# Altium PCB stepstick_rotated.PcbDoc
Units mm, origin at the board's own origin, x right, y up, seen from the top; angles counter-clockwise.
Board outline 20.32 x 15.24 mm, 2 copper layers (Top Layer, Bottom Layer), stack 2.37 mm thick; 3 components, 5 nets, 26 pads, 0 vias.
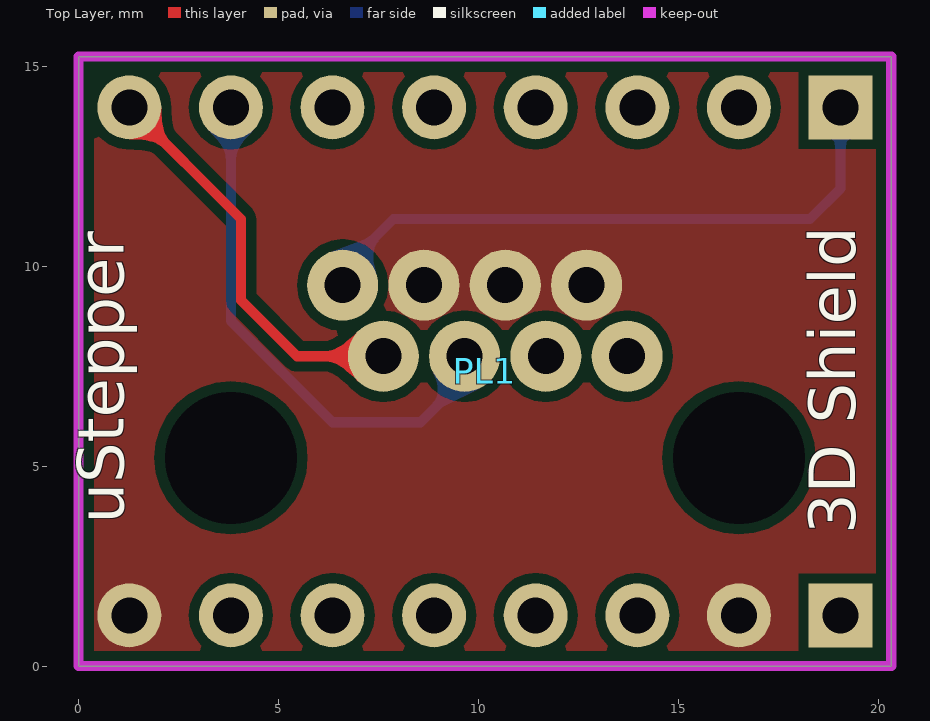
[diagram p0: Top Layer view]
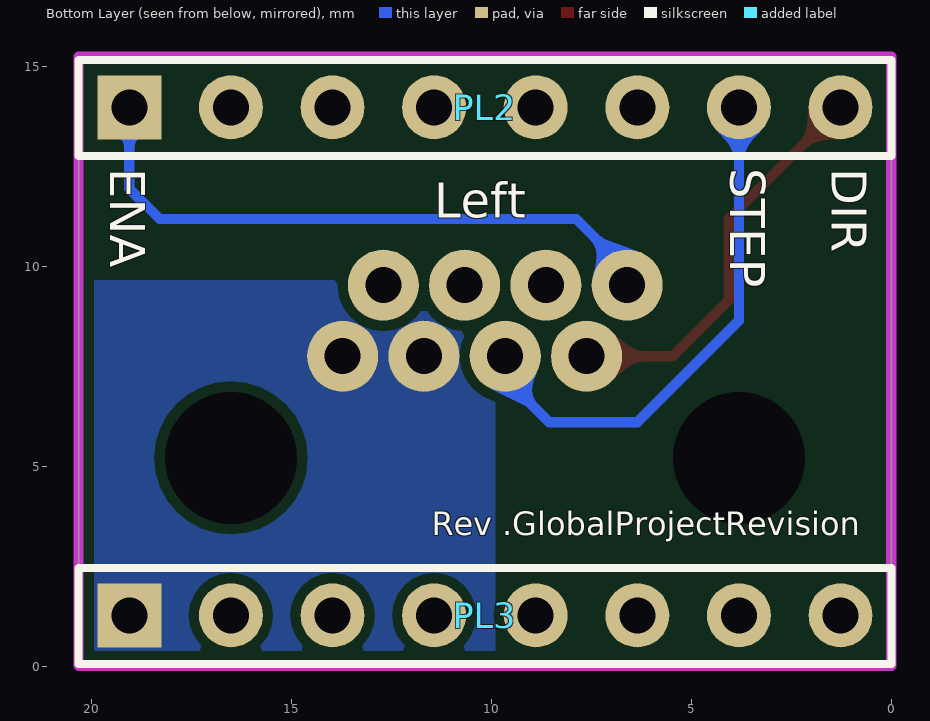
[diagram p1: Bottom Layer view, seen from below]

## Layer stack, top to bottom
Top Solder: solder mask 0.0102, Solder Resist, Dk 3.5
Top Layer: signal copper 0.035
Dielectric 1: dielectric 2.3, FR-4, Dk 4.8
Bottom Layer: signal copper 0.035
Bottom Solder: solder mask 0.0102, Solder Resist, Dk 3.5

## Board outline
0,0 20.32,0 20.32,15.24 0,15.24

## Design rules (kind name [scope] priority, off if disabled: settings)
Clearance [All] p1: gap=0.254 ignorepadtopadclearanceinfootprint=FALSE except(0: Arc-Hole Track-Hole SMDPad-Hole THPad-Hole Via-Hole Fill-Hole Poly-Hole Region-Hole Text-Hole)
PolygonConnect [All] p1: connectstyle=Direct reliefconductorwidth=0.254 reliefentries=4 polygonreliefangle="90 Angle" airgapwidth=0.254
RoutingVias [All] p1: holewidth=0.711 width=1.27 viastyle="Through Hole" minholewidth=0.711 minwidth=1.27 maxholewidth=0.711 maxwidth=1.27
SolderMaskExpansion [All] p1: expansion=0.102
Width [All] p1: maxlimit=0.254 minlimit=0.254 preferedwidth=0.254
30 further rules are at their usual default settings.

## Components (designator, comment, footprint, x,y, rotation, side; value= is the part's Value field where it differs from the comment)
PL1 "RJHSE-5080" "AMPHENOL RJHSE-5080" 10.16,7.366 r0 top
PL2 "8-pin Male Header 2.54mm" "8-pin 2.54mm header" 10.16,13.97 r180 bottom
PL3 "8-pin Male Header 2.54mm" "8-pin 2.54mm header" 10.16,1.27 r180 bottom

## Footprints (in the part's own frame and the unit in brackets; to place one, negate y for a bottom-side part, rotate by r counter-clockwise, add the part's x,y. Pads: shape width x height; smd on the part's side, far side on the other; paste and mask are expansions set on the pad)
"8-pin 2.54mm header" [mm]
  rect 1.6x1.6 hole 0.9: 1(-8.89,0)
  round 1.6 hole 0.9: 2(-6.35,0) 3(-3.81,0) 4(-1.27,0) 5(1.27,0) 6(3.81,0) 7(6.35,0) 8(8.89,0)
  silkscreen extent -10.16,-1.22 10.16,1.18, body extent -10.16,-1.24 10.16,1.25, height 15
"AMPHENOL RJHSE-5080" [mil] "RJ45 connector"
  round 0 hole 130 unplated: 0(-250,-85) 0(250,-85)
  round 70 hole 35.43: 1(140,15) 2(100,85) 3(60,15) 4(20,85) 5(-20,15) 6(-60,85) 7(-100,15) 8(-140,85)
  body extent -310,-286 310,304, height 521

## Part data
PL1: library part CMP-003-0022-0.1, "CONN MOD JACK 8P8C R/A UNSHLD", Colour=Black, Contact Resistance=20mR, Current Rating=1.5A, Flammability Rating="UL94 V-0", Max Operating Temperature=85°C, Max Voltage Rating (AC)=125V, Min Operating Temperature=-55°C, Package Quantity=36, Connector Type="Jack, RJ45", Contact Material=Bronze, Contact Plating=Gold, Depth=14.99mm, Direction=Up, Gender=Female, Housing Material=Thermoplastic, Lead Free="Lead Free", Length=15.75mm, Max Current Rating=1.5A, Mount="Panel, Through Hole", Number of Contacts=8, Number of Ports=1, Number of Positions=8, Number of Positions Loaded=8, Number of Rows=1, Orientation="Right Angle", Packaging=Tray, Pitch=2.03mm, Radiation Hardening=No, REACH SVHC=Unknown, Shielding=Unshielded, Termination=Solder, Voltage Rating=125V, Voltage Rating (DC)=125V
PL2 PL3: library part CMP-003-0009-0.3, "8 Positions Header Connector 0.100\" (2.54mm) Through Hole Gold"

## Nets (pads, with @x,y where several pads share a name; then routed paths per layer and width w, separated by ;. In a path a pad name is that pad's centre, name@x,y a point inside that pad or via, vN(x,y) a via of type N, cw(c..) or ccw(c..) an arc to the next point about the centre after c; other vN are vias at no path point)
DIR: PL1.7 PL2.8 | length 10.1
  Top Layer w0.254: PL2.8 4.064,11.176 4.064,9.144 5.461,7.747 PL1.7
ENA: PL1.8 PL2.1 | length 15.7
  Bottom Layer w0.254: PL1.8 6.604,9.906 7.874,11.176 18.288,11.176 19.05,11.938 PL2.1
GND: PL1.2 PL1.4 PL1.6 PL3.2 PL3.8
STEP: PL1.5 PL2.7 | length 13.2
  Bottom Layer w0.254: PL2.7 3.81,8.636 6.35,6.096 8.55,6.096 9.652,7.198 PL1.5
VDD: PL1.1 PL1.3 PL3.1
pads on no net: PL1.0 PL2.2 PL2.3 PL2.4 PL2.5 PL2.6 PL3.3 PL3.4 PL3.5 PL3.6 PL3.7

## Polygon pours and split planes (outlines as drawn)
GND on Top Layer "Bottom Layer-No Net" (solid, remove dead copper, pour order 2): 0,15.24 20.32,15.24 20.32,0 0,0
VDD on Bottom Layer "Bottom Layer-No Net" (solid, remove dead copper, pour order 4): 9.906,9.652 20.32,9.652 20.32,0 9.906,0

## Keep-outs
Keep-Out Layer:
  the board outline again, w0.254

## Silkscreen, mask and mechanical layers (free items; w line width, h text height)
Top Overlay:
  text "uStepper" at 1.524,3.556 h2 r90
  text "3D Shield" at 19.812,3.302 h2 r90
Bottom Overlay:
  text "DIR" at 1.778,12.446 h1.5 r90
  text "STEP" at 4.318,12.446 h1.5 r90
  text "ENA" at 19.812,12.446 h1.5 r90
  text "Left" at 11.43,10.922 h1.5
  text "Rev .GlobalProjectRevision" at 11.489,3.075 h1
Mechanical 1:
  the board outline again, w0.254